# EAGLE board InhalerCapDevelopmentBoard (EAGLE 7.2.0)
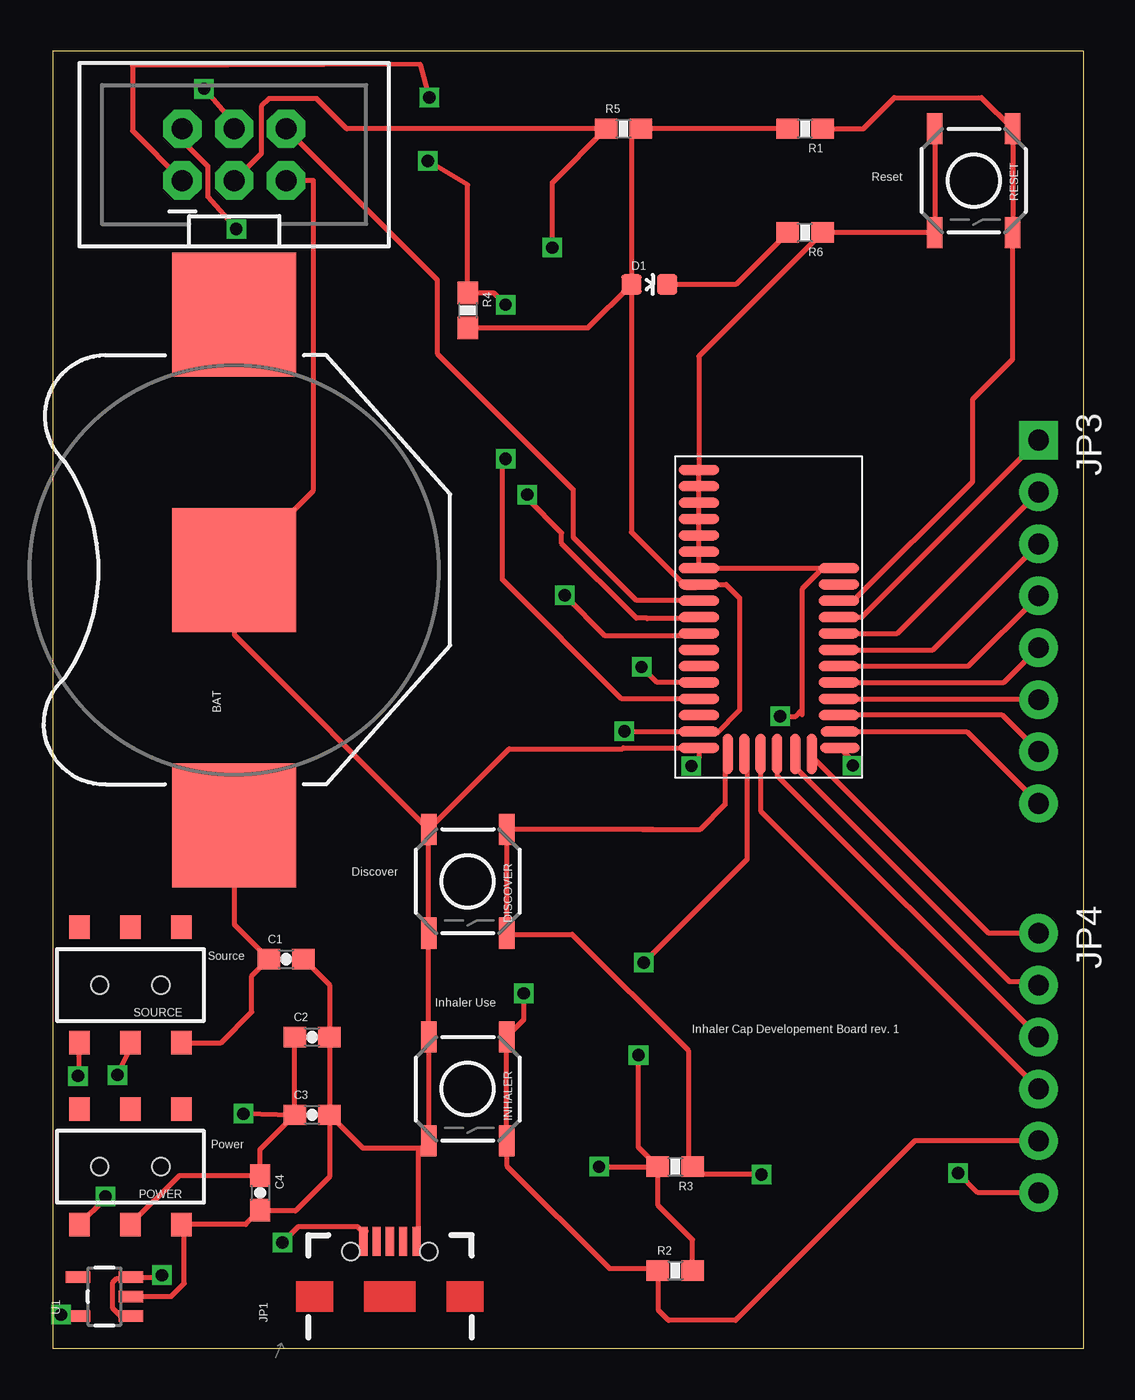
[diagram p0: board, top side]
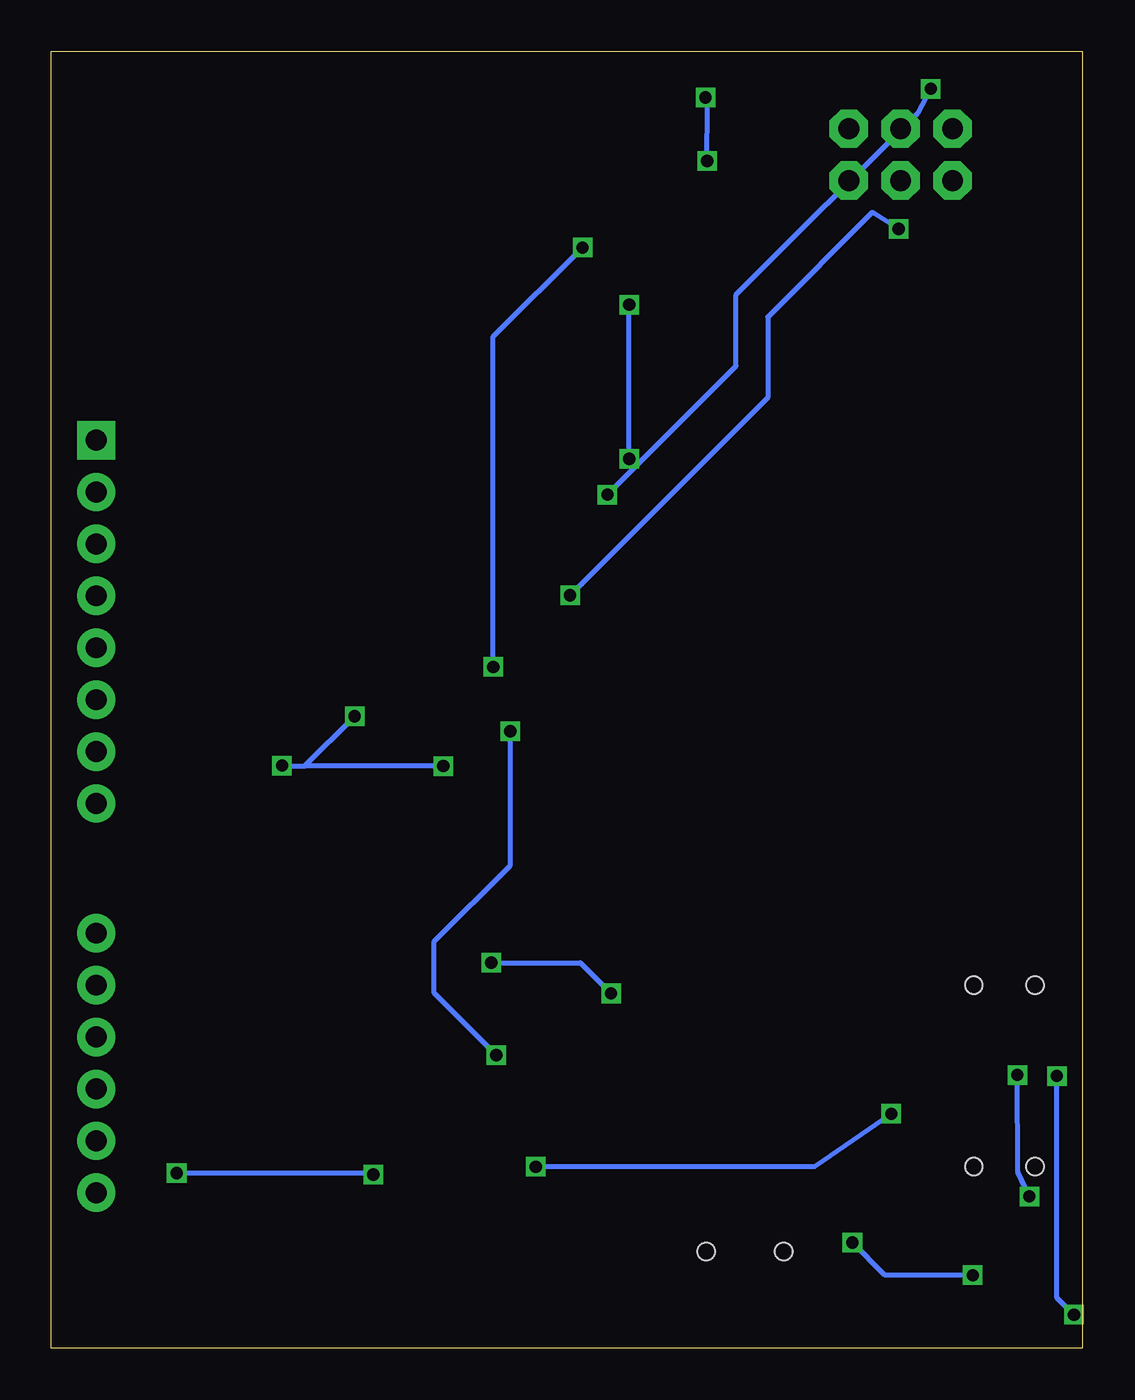
[diagram p1: board, bottom side, seen from below]

Size 50.47 x 63.49 mm. Coordinates in mm from the lower left corner, seen from the top.
Outline: 0,0 50.47,0 50.47,63.49 0,63.49 0,0
Copper layers (1*16): Top 0.0356mm / dielectric 1.5011mm / Bottom 0.0356mm
Design rules "OSHpark": minimum track width 6mil, minimum drill 13mil, track to track 6mil, track to pad 6mil, pad to pad 6mil, via to via 6mil, smd to smd 6mil, copper to edge 15mil, drill to drill 6mil, minimum pad ring 7mil, minimum via ring 7mil, stop-mask expansion 3mil, vias tented up to drill 0mil, thermal gap 10mil

## Footprints (pad centres in the part's own frame; a part is rotated, then mirrored left to right if it is on the bottom)
BATTCON_20MM = smd 6.07 x 6.07: 1 -12.5,0; 2 0,0; 3 12.5,0
BLE113-A = smd 2 x 0.5: AVDD 1.15,9.45; DVDD 1.15,2.25; GND_1 1.15,15.05; GND_2 1.15,14.25; GND_3 1.15,13.45; GND_4 1.15,12.65; GND_5 1.15,11.85; GND_6 1.15,11.05; GND_7 1.15,10.25; GND_18 1.15,1.45; GND_36 8,10.25; NC_16 1.15,3.05; NC_35 8,9.45; P0_0 8,7.85; P0_1 8,7.05; P0_2 8,6.25; P0_3 8,5.45; P0_4 8,4.65; P0_5 8,3.85; P0_6 8,3.05; P1_6 1.15,5.45; P1_7 1.15,6.25; P2_0 1.15,7.05; P2_1 1.15,7.85; P2_2 1.15,8.65; RESET# 8,8.65; SCL 1.15,4.65; SDA 1.15,3.85 | smd 1.95 x 0.5: GND_25 8.05,1.45 | smd 1.9 x 0.5: P0_7 8.05,2.25 | smd 0.5 x 2: P1_0 6.675,1.15; P1_1 5.875,1.15; P1_2 4.975,1.15; P1_3 4.175,1.15; P1_4 3.375,1.15; P1_5 2.575,1.15
0603-CAP = smd 1.1 x 1: 1 -0.85,0; 2 0.85,0
LED-0603 = smd 1 x 1: A 0,-0.877; C 0,0.877
TACTILE_SWITCH_SMD = smd 1.524 x 0.762: 1 -2.54,1.905; 2 2.54,1.905; 3 -2.54,-1.905; 4 2.54,-1.905
USB-B-MICRO-SMD_V03 = smd 1.4 x 0.4: D+1 2.7,0; D-1 2.7,0.65; GND1 2.7,-1.3; ID1 2.7,-0.65; VBUS1 2.7,1.3 | hole 0.85: 2.2,1.9; 2.2,-1.9
2X3-SHROUDED = drill 1.016 pad 1.88 octagon: 1 -1.27,2.54; 2 1.27,2.54; 3 -1.27,0; 4 1.27,0; 5 -1.27,-2.54; 6 1.27,-2.54
1X08_PIN1_NO_SILK = drill 1.016 pad 1.88 square: 1 0,0 | drill 1.016 pad 1.88: 2 2.54,0; 3 5.08,0; 4 7.62,0; 5 10.16,0; 6 12.7,0; 7 15.24,0; 8 17.78,0
1X06_NO_SILK = drill 1.016 pad 1.88: 1 0,0; 2 2.54,0; 3 5.08,0; 4 7.62,0; 5 10.16,0; 6 12.7,0
AYZ0202 = smd 1 x 1.15: 1 -2.5,2.825; 2 0,2.825; 3 2.5,2.825; 4 -2.5,-2.825; 5 0,-2.825; 6 2.5,-2.825 | hole 0.85: 1.5,0; -1.5,0
0603-RES = smd 1.1 x 1: 1 -0.85,0; 2 0.85,0
SOT23-5 = smd 0.55 x 1.2: 1 -0.95,-1.3; 2 0,-1.3; 3 0.95,-1.3; 4 0.95,1.3; 5 -0.95,1.3

## Placement (x,y rotation side)
BAT  [BATTCON_20MM]  8.89,38.1 90 top
BLE113  BLE113-A  [BLE113-A]  30.48,27.94 0 top
C1  100uF  [0603-CAP]  11.43,19.05 0 top
C2  .47uF  [0603-CAP]  12.7,15.24 0 top
C3  .47uF  [0603-CAP]  12.7,11.43 0 top
C4  .47uF  [0603-CAP]  10.16,7.62 270 top
D1  GREEN  [LED-0603]  29.21,52.07 270 top
DISCOVER  [TACTILE_SWITCH_SMD]  20.32,22.86 270 top
INHALER  [TACTILE_SWITCH_SMD]  20.32,12.7 270 top
JP1  USB_MICROB_PLUGCONN-11752  [USB-B-MICRO-SMD_V03]  16.51,2.54 90 top
JP2  [2X3-SHROUDED]  8.89,58.42 90 top
JP3  [1X08_PIN1_NO_SILK]  48.26,44.45 270 top
JP4  [1X06_NO_SILK]  48.26,20.32 270 top
POWER  [AYZ0202]  3.81,8.89 180 top
R1  10K  [0603-RES]  36.83,59.69 180 top
R2  4.7k  [0603-RES]  30.48,3.81 0 top
R3  4.7k  [0603-RES]  30.48,8.89 180 top
R4  4.7k  [0603-RES]  20.32,50.8 270 top
R5  4.7k  [0603-RES]  27.94,59.69 0 top
R6  220  [0603-RES]  36.83,54.61 180 top
RESET  [TACTILE_SWITCH_SMD]  45.09,57.15 270 top
SOURCE  [AYZ0202]  3.81,17.78 180 top
U1  [SOT23-5]  2.54,2.54 90 top

## Library data of the parts
BAT = SparkFun-Electromechanical
BLE113 = BLE113-A
C1 R6 = SparkFun-Passives
C2-C4 = SparkFun-Capacitors
D1 = SparkFun-LED; PROD_ID: DIO-00821
DISCOVER INHALER RESET = SparkFun-Electromechanical; PROD_ID: SWCH-08247
JP1 = SparkFun-Connectors; PROD_ID: CONN-11752
JP2 = SparkFun-Connectors; PROD_ID: CONN-10681
JP3 JP4 = SparkFun-Connectors
POWER SOURCE = SparkFun-Electromechanical; PROD_ID: SWCH-08179
R1-R5 = SparkFun-Resistors
U1 = SparkFun-PowerIC; PROD_ID: VREG-00822

## Nets
GND: BAT.2 BLE113.GND_1 BLE113.GND_2 BLE113.GND_3 BLE113.GND_4 BLE113.GND_5 BLE113.GND_6 BLE113.GND_7 BLE113.GND_18 BLE113.GND_25 BLE113.GND_36 C1.2 C2.2 C3.2 C4.2 DISCOVER.3 DISCOVER.4 INHALER.3 INHALER.4 JP1.GND1 JP2.5 POWER.1 R6.1 RESET.3 RESET.4 U1.2
N$1: BLE113.P1_4 INHALER.1 INHALER.2 JP4.5 R2.1
N$2: BLE113.AVDD BLE113.DVDD C2.1 C3.1 C4.1 D1.A POWER.2 R1.2 R2.2 R3.2 R4.2 R5.2
N$3: POWER.3 SOURCE.2
N$4: BAT.1 C1.1 SOURCE.1
N$5: SOURCE.3 U1.5
N$6: JP1.VBUS1 U1.1 U1.3
N$7: BLE113.RESET# R1.1 RESET.1 RESET.2
N$8: BLE113.P0_6 JP3.7
N$9: BLE113.P0_4 JP3.5
N$10: BLE113.P1_7
N$11: BLE113.NC_16
N$12: BLE113.P1_2 JP4.3
N$13: BLE113.P1_5 DISCOVER.1 DISCOVER.2 JP4.6 R3.1
N$14: BLE113.SDA JP2.1 R4.1
N$15: BLE113.SCL JP2.3 R5.1
N$16: D1.C R6.2
N$17: BLE113.P1_0 JP4.1
N$18: BLE113.P0_0 JP3.1
N$19: BLE113.P1_1 JP4.2
N$20: BLE113.P0_1 JP3.2
N$21: BLE113.P2_0 JP2.2
N$22: BLE113.P2_1 JP2.4
N$23: BLE113.P2_2 JP2.6
N$24: BLE113.P0_2 JP3.3
N$25: BLE113.P1_3 JP4.4
N$26: BLE113.P0_3 JP3.4
N$27: BLE113.P0_5 JP3.6
N$28: BLE113.P0_7 JP3.8

## Tracks (layer width: path | path; a pad name or v marks a point on that pad's centre or on a via)
GND  (via drill 0.6)
  Top 0.254: RESET.3 RESET.4 R6.1 31.63,48.56 BLE113.GND_1 BLE113.GND_2 BLE113.GND_3 BLE113.GND_4 BLE113.GND_5 BLE113.GND_6 BLE113.GND_7 BLE113.GND_36 37.71,38.19 36.68,37.16 36.68,31.24 | JP1.GND1 17.81,5.64 17.91,5.74 17.91,9.65 18.06,9.8 | 18.06,9.8 INHALER.4 INHALER.3 DISCOVER.4 DISCOVER.3 | C1.2 13.55,17.78 C2.2 C3.2 | C3.2 15.18,9.8 18.06,9.8 | C3.2 13.55,8.39 11.89,6.73 10.2,6.73 C4.2 9.46,6.07 POWER.1 6.45,5.92 6.45,3.17 5.82,2.54 U1.2 | DISCOVER.3 8.89,34.92 BAT.2 12.78,41.99 12.78,57.15 JP2.5 | DISCOVER.3 22.35,29.34 27.89,29.34 27.94,29.39 BLE113.GND_18 31.63,28.86 v31.27,28.5 | 36.68,31.24 36.68,31.01 | v39.17,28.52 39.17,28.75 BLE113.GND_25 | v35.61,30.94 36.37,30.94 36.68,31.24
  Bottom 0.254: v31.27,28.5 38.05,28.5 | 39.17,28.5 39.22,28.45 | 39.17,28.5 v39.17,28.52 | 39.17,28.5 38.05,28.5 | 38.05,28.5 v35.61,30.94
N$1  (via drill 0.6)
  Top 0.152: 33.98,28.96 BLE113.P1_4
  Top 0.254: JP4.5 42.22,10.16 33.43,1.37 30.15,1.37 29.67,1.85 29.67,3.77 R2.1 29.53,3.91 27.25,3.91 22.23,8.94 INHALER.2 INHALER.1 23.06,16.08 v23.06,17.37 | 33.98,28.96 33.98,23.93 v28.93,18.87
  Bottom 0.254: v28.93,18.87 24.56,18.87 v23.06,17.37
N$2  (via drill 0.6)
  Top 0.254: R1.2 R5.2 28.33,59.23 D1.A | R2.2 31.33,5.32 29.64,7.01 29.64,8.88 R3.2 | POWER.2 6.21,8.47 C4.1 10.16,9.74 C3.1 | C3.1 C2.1 | C3.1 11.82,11.4 v9.35,11.48 | v26.75,8.89 R3.2 | R3.2 28.68,9.84 v28.68,14.35 | v27.99,30.2 31.62,30.2 BLE113.DVDD 31.72,30.1 32.49,30.1 33.63,31.24 33.63,36.73 32.97,37.39 BLE113.AVDD 31.48,37.24 31.04,37.24 28.33,39.94 D1.A | R4.2 26.21,49.95 D1.A
  Bottom 0.254: v9.35,11.48 13.11,8.89 v26.75,8.89 | v28.68,14.35 31.73,17.4 31.73,19.91 27.99,23.65 v27.99,30.2
N$3  (via drill 0.6)
  Top 0.254: POWER.3 2.59,7.35 v2.59,7.44 | v3.17,13.39 3.81,14.68 SOURCE.2
  Bottom 0.254: v2.59,7.44 3.15,8.64 v3.17,13.39
N$4
  Top 0.254: SOURCE.1 8.25,14.96 9.75,16.46 9.75,18.22 C1.1 8.89,20.74 BAT.1
N$5  (via drill 0.6)
  Top 0.254: U1.5 1.18,1.65 v0.41,1.65 | v1.25,13.34 1.31,13.4 SOURCE.3
  Bottom 0.254: v0.41,1.65 1.25,2.49 v1.25,13.34
N$6  (via drill 0.6)
  Top 0.254: U1.1 3.31,1.59 2.95,1.96 2.95,3.23 3.15,3.43 3.78,3.43 U1.3 5.27,3.49 v5.36,3.58 | v11.25,5.18 12.04,5.97 14.91,5.97 15.14,5.74 15.37,5.74 15.21,5.58 JP1.VBUS1
  Bottom 0.254: v5.36,3.58 9.65,3.58 v11.25,5.18
N$7
  Top 0.254: R1.1 39.67,59.69 41.2,61.21 45.47,61.21 RESET.1 RESET.2 46.99,48.41 45.03,46.46 45.03,42.42 39.21,36.59 BLE113.RESET#
N$8
  Top 0.254: BLE113.P0_6 39.17,30.99 39.19,31.01 46.46,31.01 JP3.7
N$9
  Top 0.254: BLE113.P0_4 46.56,32.59 JP3.5
N$12
  Top 0.254: BLE113.P1_2 35.45,28.05 JP4.3
N$13  (via drill 0.6)
  Top 0.152: 32.92,28.96 BLE113.P1_5 | 22.25,25.45 DISCOVER.1 | 31.24,8.99 R3.1 | 22.25,20.27 DISCOVER.2
  Top 0.254: JP4.6 45.29,7.62 v44.32,8.59 | v34.7,8.51 31.71,8.51 R3.1 31.11,9.11 31.11,14.58 25.43,20.27 22.25,20.27 | 29.36,25.4 28.85,25.4 | 28.85,25.4 DISCOVER.1 DISCOVER.2 | 32.92,28.96 32.92,26.62 31.67,25.38 28.88,25.38 28.85,25.4
  Bottom 0.254: v44.32,8.59 34.77,8.59 v34.7,8.51
N$14  (via drill 0.6)
  Top 0.254: v18.36,58.12 20.32,56.95 R4.1 21.6,51.65 v22.17,51.08 | v18.44,61.21 18.01,62.84 3.91,62.76 3.91,59.59 JP2.1 | BLE113.SDA 27.85,31.79 22.02,37.62 22.02,43.38 v22.17,43.54
  Bottom 0.254: v18.36,58.12 18.34,60.78 v18.44,61.21 | v22.17,43.54 v22.17,51.08
N$15  (via drill 0.6)
  Top 0.254: JP2.3 10.21,58.47 10.21,60.78 10.59,61.16 12.93,61.16 14.4,59.69 R5.1 24.46,57.06 v24.46,53.87 | BLE113.SCL 29.59,32.59 v28.83,33.35
  Bottom 0.254: v28.83,33.35 28.83,49.51 v24.46,53.87
N$16
  Top 0.254: R6.2 33.44,52.07 D1.C
N$17
  Top 0.152: 37.19,28.96 BLE113.P1_0
  Top 0.254: 37.19,28.96 45.8,20.34 48.23,20.34 JP4.1
N$18
  Top 0.254: BLE113.P0_0 39.6,35.79 JP3.1
N$19
  Top 0.254: BLE113.P1_1 36.35,28.44 46.84,17.96 48.08,17.96 JP4.2
N$20
  Top 0.254: BLE113.P0_1 41.34,34.99 JP3.2
N$21  (via drill 0.6)
  Top 0.254: JP2.2 6.35,59.11 7.59,57.86 7.59,56.36 v8.99,54.79 | v25.07,36.85 27.03,34.9 31.06,34.9 31.16,34.99 BLE113.P2_0
  Bottom 0.254: v8.99,54.79 10.26,55.6 15.39,50.47 15.39,46.53 v25.07,36.85
N$22  (via drill 0.6)
  Top 0.254: BLE113.P2_1 31.55,35.71 29.11,35.71 29.08,35.74 28.57,35.74 24.92,39.4 24.92,39.9 23.24,41.58 v23.24,41.78 | v7.42,61.65 8.89,59.94 JP2.4
  Bottom 0.254: v23.24,41.78 16.94,48.08 16.94,51.56 8.05,60.45 v7.42,61.65
N$23
  Top 0.254: JP2.6 18.82,52.3 18.82,48.69 25.48,42.04 25.48,39.7 28.55,36.63 31.01,36.63 31.05,36.59 BLE113.P2_2
N$24
  Top 0.254: BLE113.P0_2 43.08,34.19 JP3.3
N$25
  Top 0.254: BLE113.P1_3 34.66,26.3 JP4.4
N$26
  Top 0.254: BLE113.P0_3 44.82,33.39 JP3.4
N$27
  Top 0.254: BLE113.P0_5 48.22,31.79 JP3.6
N$28
  Top 0.254: BLE113.P0_7 44.74,30.19 JP3.8

## Text on the board
_tsilk: Reset | Discover | Source | Inhaler Use | Inhaler Cap Developement Board rev. 1 | Power